# Altium PCB 24.064.PcbDoc
Units mm, origin at the board's own origin, x right, y up, seen from the top; angles counter-clockwise.
Board outline 38 x 24 mm, 2 copper layers (Top Layer, Bottom Layer); 3 components, 16 nets, 33 pads, 0 vias.
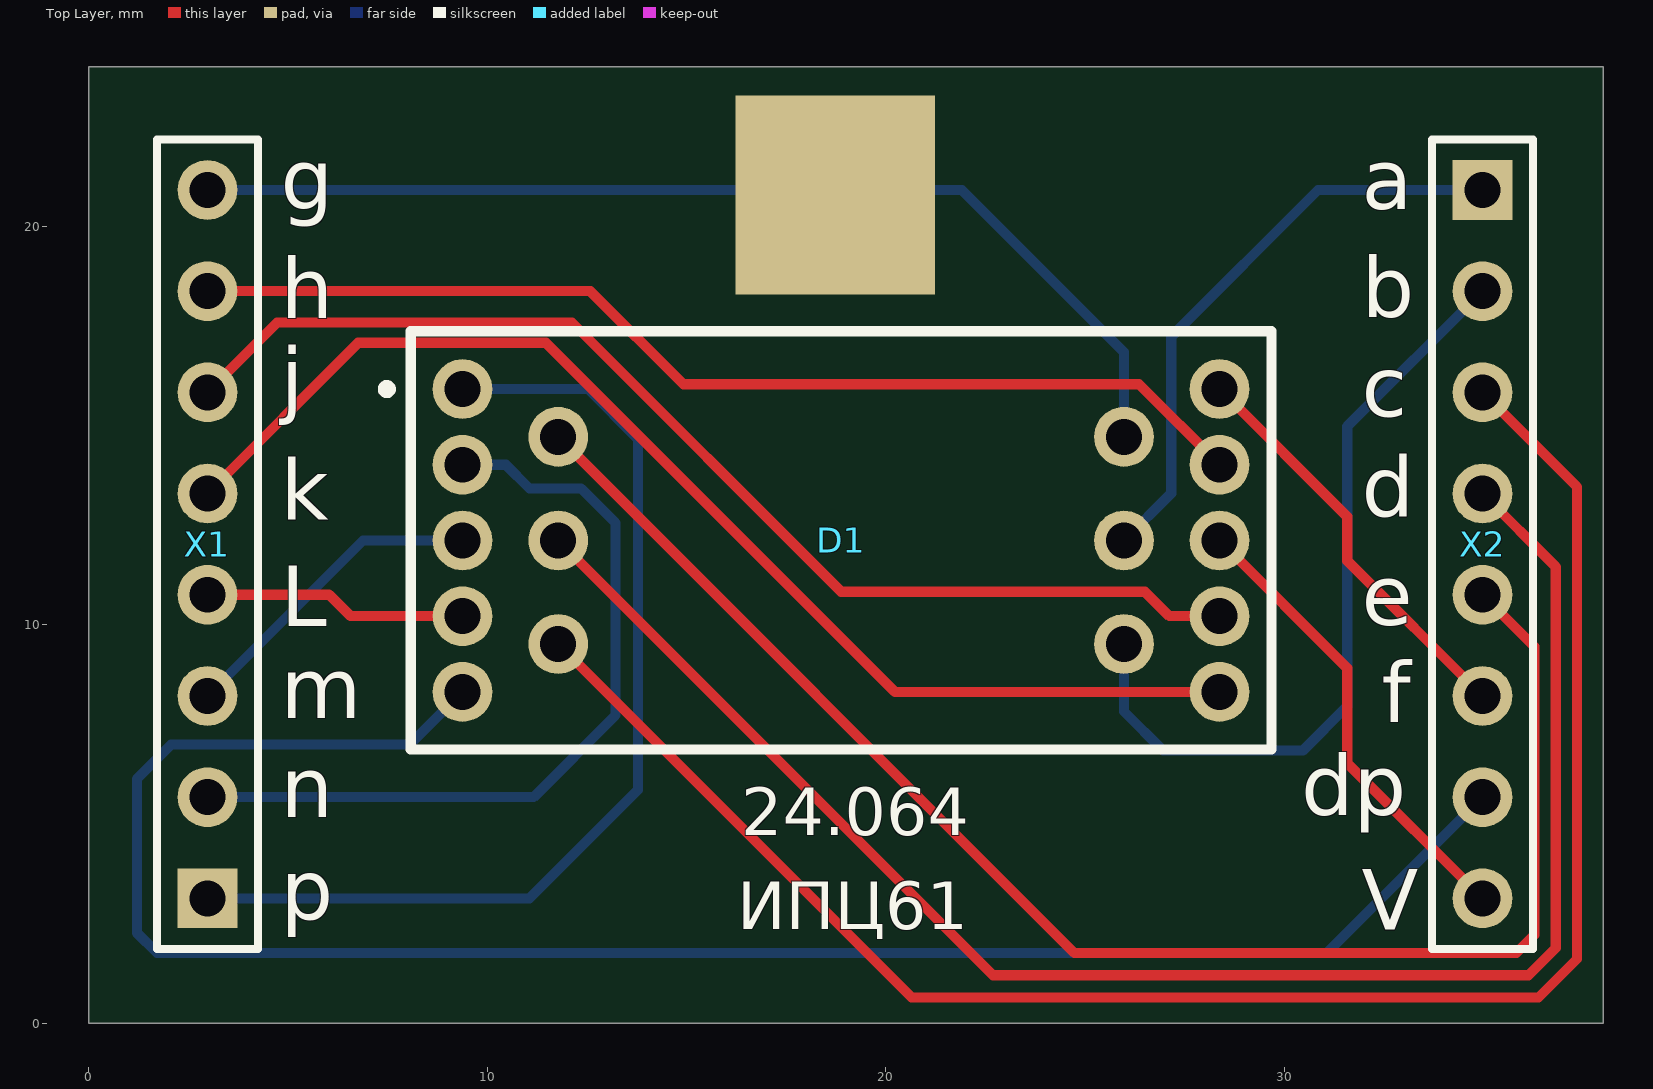
[diagram p0: Top Layer view]
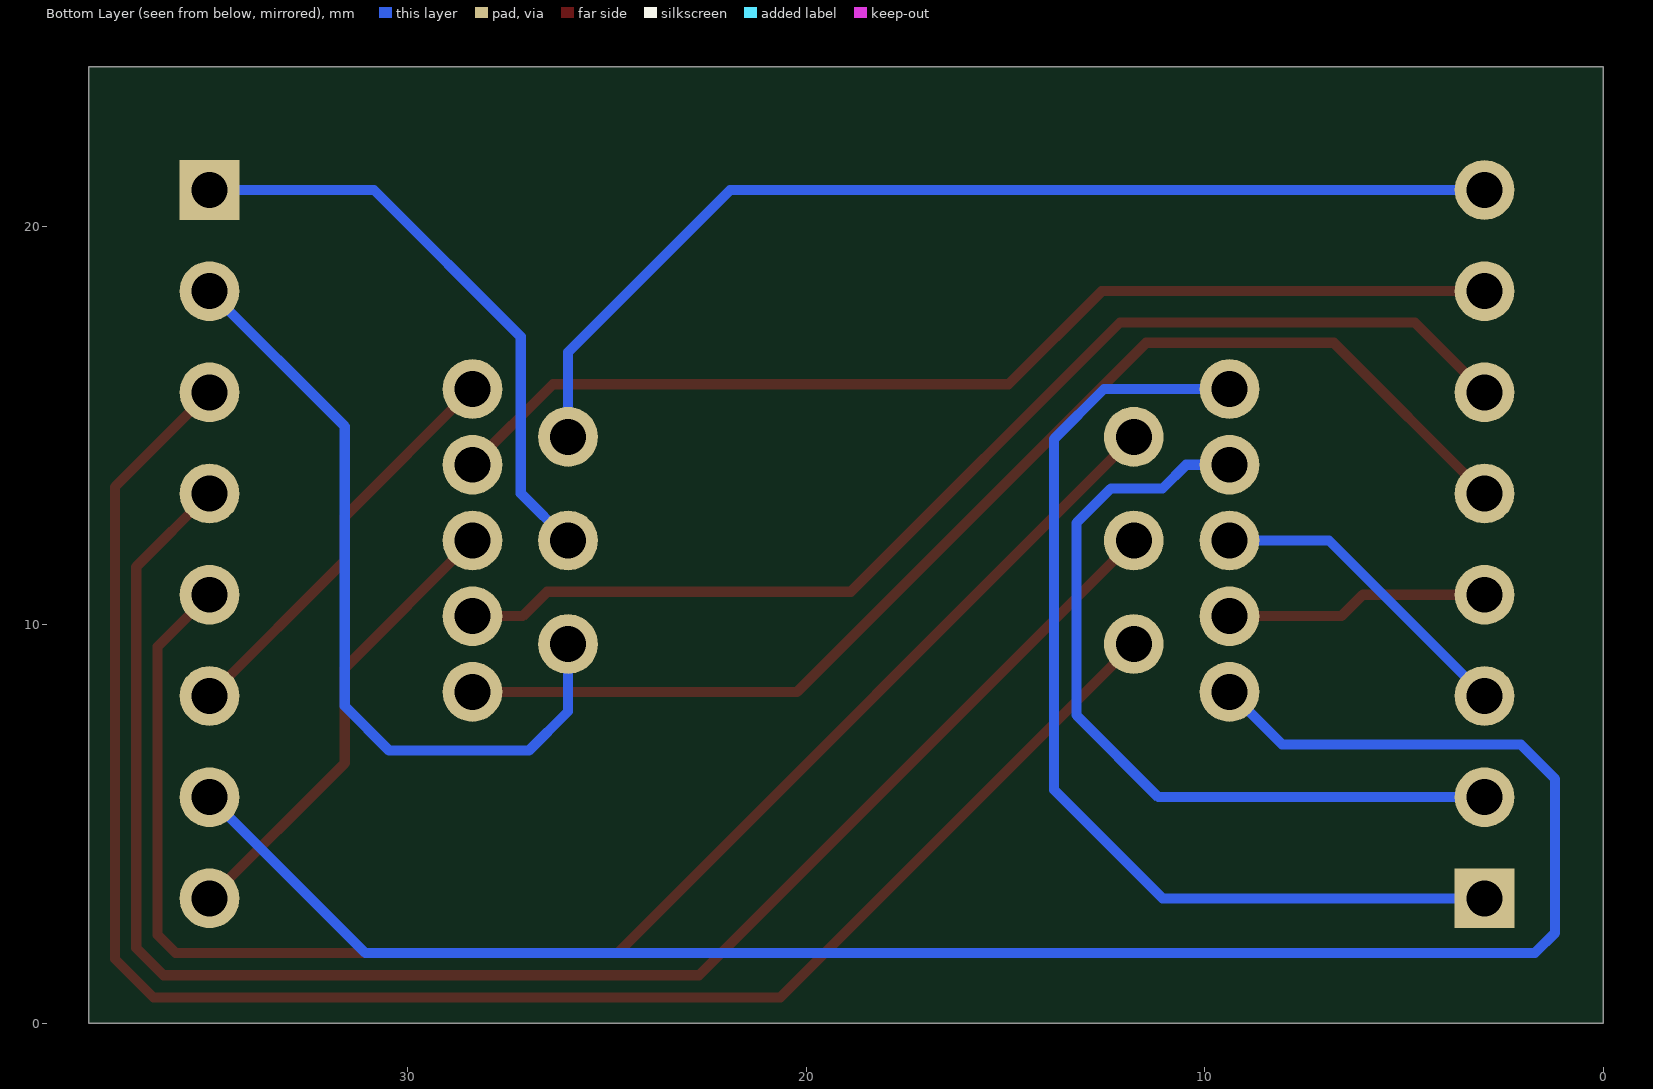
[diagram p1: Bottom Layer view, seen from below]

## Layer stack, top to bottom
Top Solder: solder mask 0.0102, Solder Resist, Dk 3.5
Top Layer: signal copper 0.0356
Dielectric 1: dielectric 0.32, FR-4, Dk 4.8
Bottom Layer: signal copper 0.0356
Bottom Solder: solder mask 0.0102, Solder Resist, Dk 3.5

## Board outline
38,0 0,0 0,24 38,24

## Design rules (kind name [scope] priority, off if disabled: settings)
Clearance [All] p1: gap=0.254 ignorepadtopadclearanceinfootprint=FALSE except(0: Arc-Hole Track-Hole SMDPad-Hole THPad-Hole Via-Hole Fill-Hole Poly-Hole Region-Hole Text-Hole)
PolygonConnect [All] p1: connectstyle=Relief reliefconductorwidth=0.254 reliefentries=4 polygonreliefangle="90 Angle" airgapwidth=0.254
RoutingVias [All] p1: holewidth=0.711 width=1.27 viastyle="Through Hole" minholewidth=0.711 minwidth=1.27 maxholewidth=0.711 maxwidth=1.27
SolderMaskExpansion [All] p1: expansion=0.102
Width [All] p1: maxlimit=0.254 minlimit=0.254 preferedwidth=0.254
30 further rules are at their usual default settings.

## Classes and differential pairs
component class 24.064: X1 X2

## Components (designator, comment, footprint, x,y, rotation, side; value= is the part's Value field where it differs from the comment)
D1 "Indicator 14" "INDICATIR 14" 9.376,15.916 r270 top
X1 "Header 8" HDR1X8 2.975,3.134 r90 top
X2 "Header 8" HDR1X8 34.975,20.914 r270 top

## Footprints (in the part's own frame and the unit in brackets; to place one, negate y for a bottom-side part, rotate by r counter-clockwise, add the part's x,y. Pads: shape width x height; smd on the part's side, far side on the other; paste and mask are expansions set on the pad)
HDR1X8 [mm] "Connector; Header; 8 Position"
  rect 1.5x1.5 hole 0.9: 1(0,0)
  round 1.5 hole 0.9: 2(2.54,0) 3(5.08,0) 4(7.62,0) 5(10.16,0) 6(12.7,0) 7(15.24,0) 8(17.78,0)
  silkscreen extent -1.27,-1.27 19.05,1.27
"INDICATIR 14" [mm] "24.064"
  round 1.5 hole 0.9: 1(0,0) 2(1.9,0) 3(3.8,0) 4(5.7,0) 5(7.6,0) 6(6.4,2.4) 7(3.8,2.4) 8(1.2,2.4) 9(1.2,16.6) 10(3.8,16.6) 11(6.4,16.6) 12(7.6,19) 13(5.7,19) 14(3.8,19) 15(1.9,19) 16(0,19)
  silkscreen extent -1.45,-2 9.05,20.3

## Part data
X1 X2: "Header, 8-Pin", LatestRevisionDate=17-Jul-2002, LatestRevisionNote="Re-released for DXP Platform.", Publisher="Altium Limited"

## Free pads (board coordinates)
  rect 5x5 smd: 0(18.729,20.787)

## Nets (pads, with @x,y where several pads share a name; then routed paths per layer and width w, separated by ;. In a path a pad name is that pad's centre, name@x,y a point inside that pad or via, vN(x,y) a via of type N, cw(c..) or ccw(c..) an arc to the next point about the centre after c; other vN are vias at no path point)
a: D1.10 X2.1 | length 14.9
  Bottom Layer w0.254: D1.10 27.162,13.302 27.162,17.231 30.845,20.914 X2.1
b: D1.11 X2.2 | length 20
  Bottom Layer w0.254: D1.11 25.976,7.824 26.959,6.842 30.464,6.842 31.582,7.96 31.582,14.981 X2.2
c: D1.6 X2.3 | length 44.9
  Top Layer w0.254: D1.6 20.648,0.644 36.382,0.644 37.347,1.61 37.347,13.461 X2.3
d: D1.7 X2.4 | length 42
  Top Layer w0.254: D1.7 22.689,1.203 36.128,1.203 36.814,1.889 36.814,11.454 X2.4
dp: D1.5 X2.7 | length 48.5
  Bottom Layer w0.254: D1.5 8.055,6.994 2.067,6.994 1.203,6.131 1.203,2.27 1.711,1.762 31.063,1.762 X2.7
e: D1.8 X2.5 | length 39.1
  Top Layer w0.254: D1.8 24.73,1.762 35.823,1.762 36.281,2.219 36.281,9.448 X2.5
f: D1.16 X2.6 | length 10.4
  Top Layer w0.254: D1.16 31.582,12.711 31.582,11.607 X2.6
g: D1.9 X1.8 | length 26.8
  Bottom Layer w0.254: X1.8 21.904,20.914 25.976,16.841 D1.9
h: D1.15 X1.7 | length 27.2
  Top Layer w0.254: X1.7 12.582,18.374 14.919,16.037 26.356,16.037 D1.15
j: D1.13 X1.6 | length 29.2
  Top Layer w0.254: X1.6 4.727,17.586 12.125,17.586 18.882,10.83 26.502,10.83 27.115,10.216 D1.13
k: D1.12 X1.5 | length 30.6
  Top Layer w0.254: X1.5 6.759,17.078 11.465,17.078 20.227,8.316 D1.12
l: D1.4 X1.4 | length 6.6
  Top Layer w0.254: X1.4 6.029,10.754 6.567,10.216 D1.4
m: D1.3 X1.3 | length 8
  Bottom Layer w0.254: X1.3 6.877,12.116 D1.3
n: D1.2 X1.2 | length 20.4
  Bottom Layer w0.254: X1.2 11.16,5.674 13.217,7.731 13.217,12.557 12.354,13.421 11.058,13.421 10.463,14.016 D1.2
p: D1.1 X1.1 | length 25.7
  Bottom Layer w0.254: X1.1 11.058,3.134 13.776,5.851 13.776,14.665 12.525,15.916 D1.1
VCC: D1.14 X2.8 | length 11.7
  Top Layer w0.254: D1.14 31.582,8.911 31.582,6.527 X2.8

## Silkscreen, mask and mechanical layers (free items; w line width, h text height)
Top Overlay:
  text "g" at 4.818,20.431 h1.52
  text "a" at 31.943,20.431 h1.52
  text "b" at 31.943,17.713 h1.52
  text "h" at 4.818,17.688 h1.52
  text "j" at 4.818,15.453 h1.52
  text "c" at 31.943,15.224 h1.52
  text "d" at 31.943,12.709 h1.52
  text "k" at 4.818,12.633 h1.52
  text "e" at 31.943,9.992 h1.52
  text "L" at 4.818,9.966 h1.52
  text "m" at 4.818,7.655 h1.52
  text "f" at 32.451,7.553 h1.52
  text "dp" at 30.42,5.216 h1.52
  text "n" at 4.818,5.166 h1.52
  text "24.064" at 16.375,4.327 h2.03
  text "p" at 4.818,2.6 h1.52
  text "V" at 31.943,2.346 h1.52
  text "ИПЦ61" at 16.274,1.965 h2.03
Mechanical 1:
  the board outline again, w0.254